# Altium PCB charger_sdc_pcb.PcbDoc
Units mm, origin at the board's own origin, x right, y up, seen from the top; angles counter-clockwise.
Board outline 70.3 x 49 mm, 2 copper layers (Top Layer, Bottom Layer); 35 components, 23 nets, 116 pads, 20 vias.
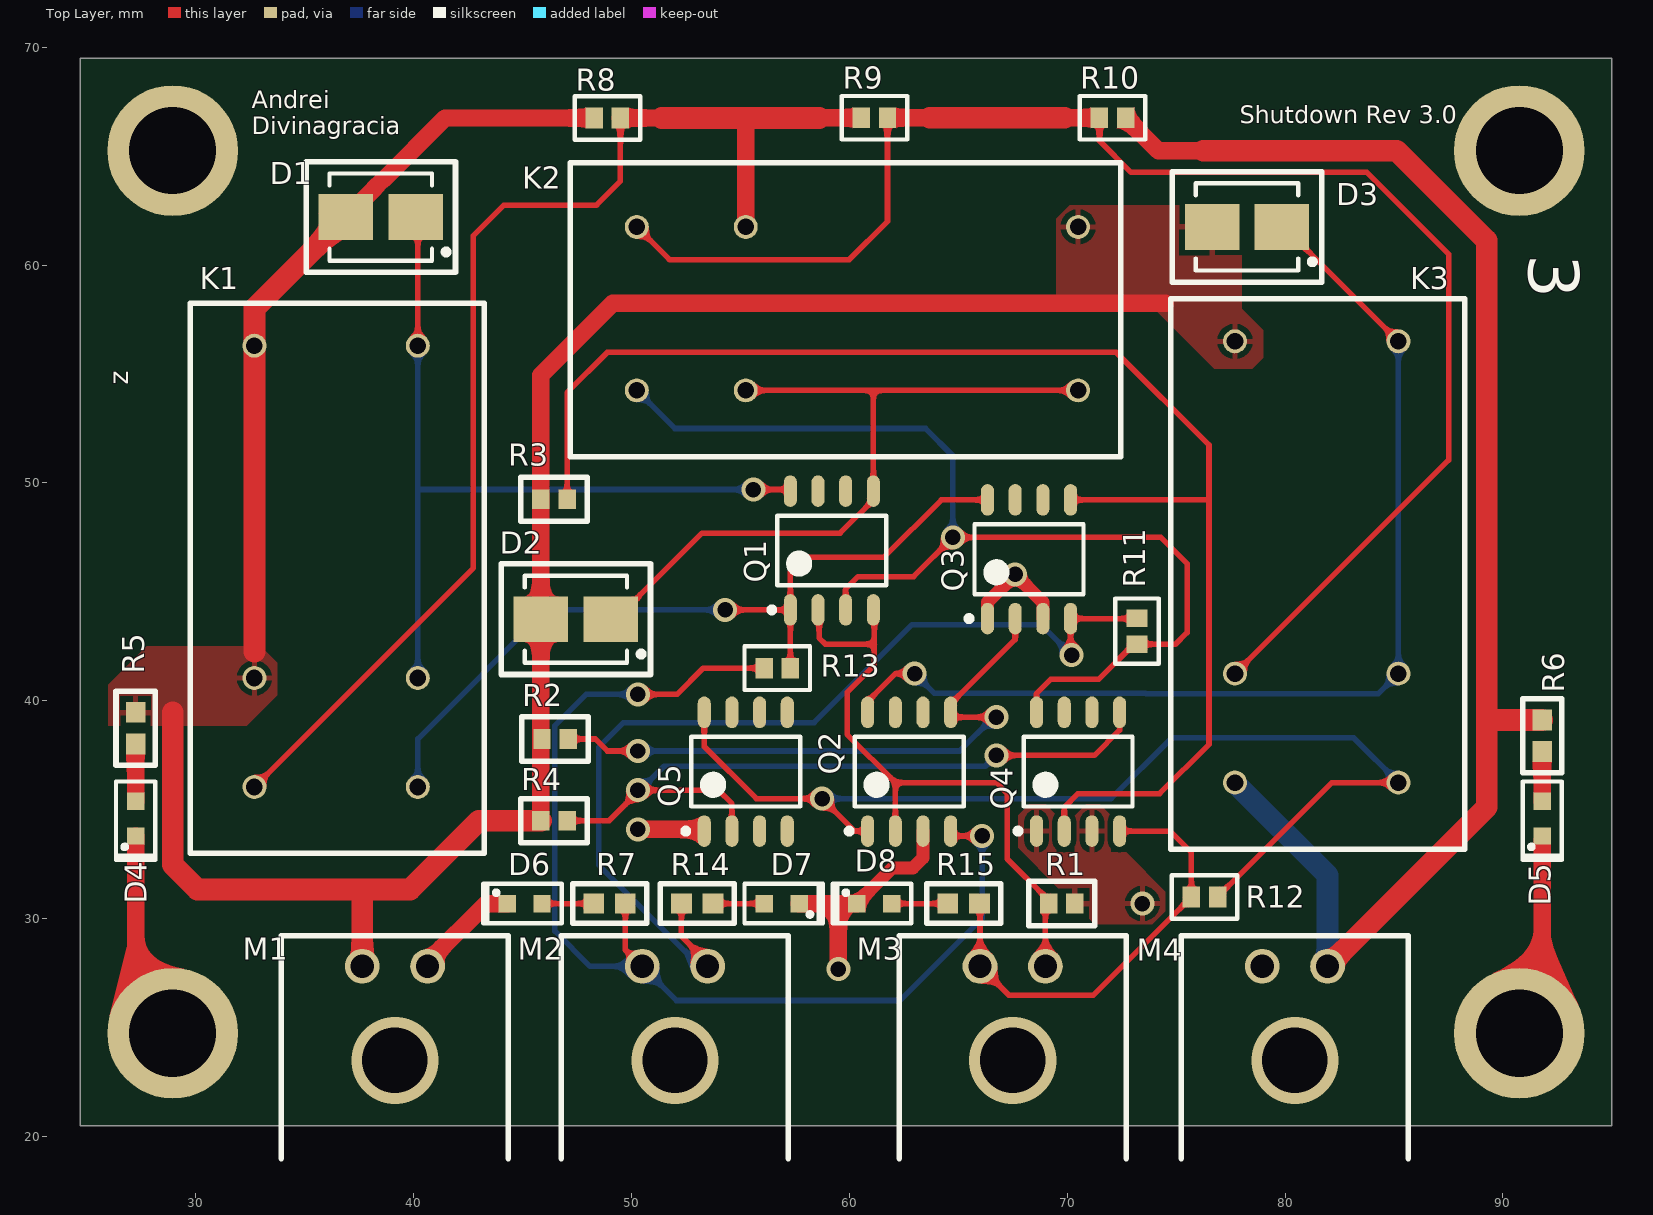
[diagram p0: Top Layer view]
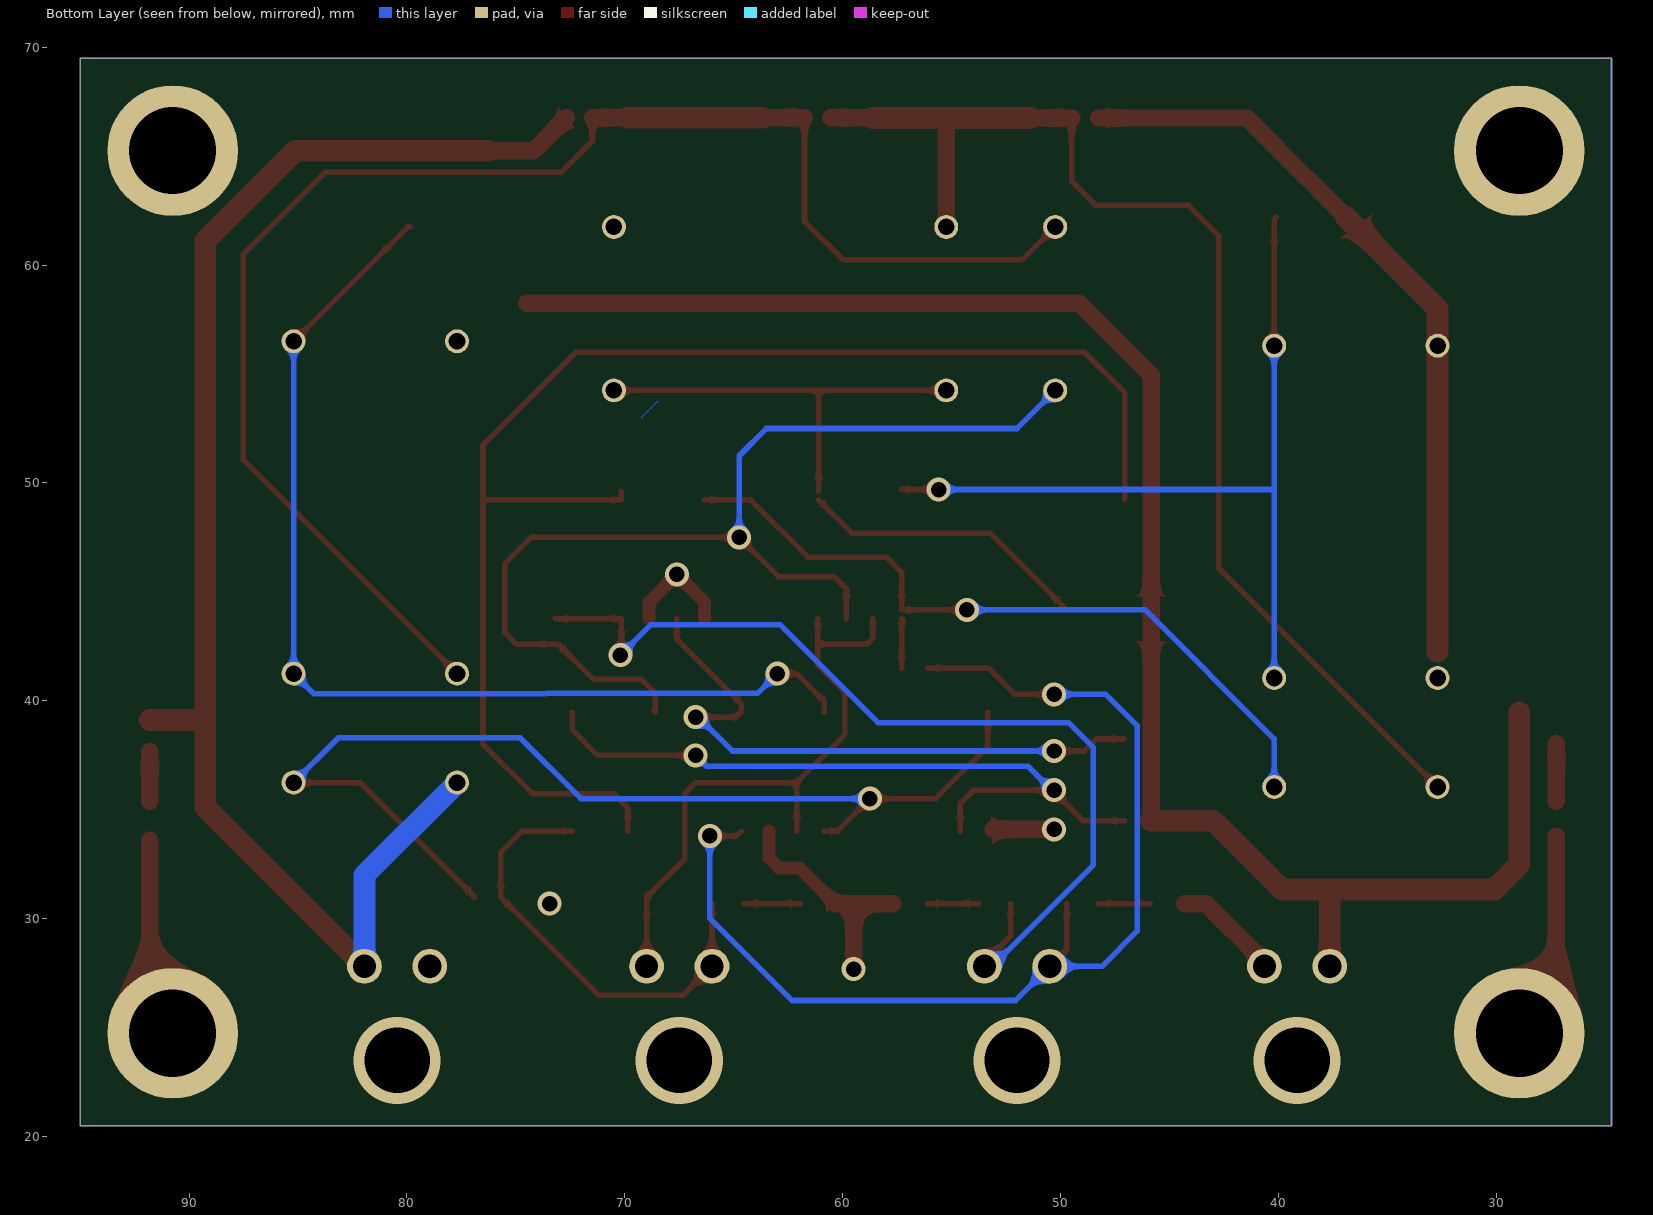
[diagram p1: Bottom Layer view, seen from below]

## Layer stack, top to bottom
Top Solder: solder mask 0.0102, Solder Resist, Dk 3.5
Top Layer: signal copper 0.0356
Dielectric 1: dielectric 0.32, FR-4, Dk 4.8
Bottom Layer: signal copper 0.0356
Bottom Solder: solder mask 0.0102, Solder Resist, Dk 3.5

## Board outline
24.7,20.5 95,20.5 95,69.5 24.7,69.5

## Design rules (kind name [scope] priority, off if disabled: settings)
Clearance [All] p1: gap=0.254 ignorepadtopadclearanceinfootprint=FALSE except(0: Arc-Hole Track-Hole SMDPad-Hole THPad-Hole Via-Hole Fill-Hole Poly-Hole Region-Hole Text-Hole)
PolygonConnect [All] p1: connectstyle=Relief reliefconductorwidth=0.254 reliefentries=4 polygonreliefangle="90 Angle" airgapwidth=0.254
RoutingVias [All] p1: holewidth=0.711 width=1.27 viastyle="Through Hole" minholewidth=0.711 minwidth=1.27 maxholewidth=0.711 maxwidth=1.27
SolderMaskExpansion [All] p1: expansion=0.102
Width [All] p1: maxlimit=1 minlimit=0.254 preferedwidth=0.254 minimp=50.000000 maximp=50.000000 favimp=50.000000
30 further rules are at their usual default settings.

## Components (designator, comment, footprint, x,y, rotation, side; value= is the part's Value field where it differs from the comment)
D1 "SD560BTR" DIOM4436X26N 38.5,62.2 r180 top
D2 "SD560BTR" DIOM4436X26N 47.45,43.75 r180 top
D3 "SD560BTR" DIOM4436X26N 78.25,61.75 r180 top
D4 "Green" "LED GREEN" 27.25,34.6 r90 top
D5 "Green" "LED GREEN" 91.8,34.6 r90 top
D6 "Red" "LED RED" 45.1,30.7 r0 top
D7 "Red" "LED RED" 56.895,30.7 r180 top
D8 "Red" "LED RED" 61.145,30.7 r0 top
K1 "3A" RELAY02_FOOTPRINT 30,58 r270 top
K2 "3A" RELAY02_FOOTPRINT 72.2,64.45 r180 top
K3 "3A" RELAY02_FOOTPRINT 75,58.2 r270 top
M1 "MOLEX" "MOLEX 1" 39.15,23.5 r0 top
M2 "MOLEX" "MOLEX 1" 52,23.5 r0 top
M3 "MOLEX" "MOLEX 1" 67.5,23.5 r0 top
M4 "MOLEX" "MOLEX 1" 80.45,23.5 r0 top
Q1 "DMN2029USD-13" SOIC127P600X175-8N 59.2,46.9 r90 top
Q2 "DMN2029USD-13" SOIC127P600X175-8N 62.75,36.75 r90 top
Q3 "DMN2029USD-13" SOIC127P600X175-8N 68.25,46.5 r90 top
Q4 "DMN2029USD-13" SOIC127P600X175-8N 70.5,36.75 r90 top
Q5 "DMN2029USD-13" SOIC127P600X175-8N 55.25,36.75 r90 top
R1 "10KΩ" 10KOHM 69.75,30.7 r0 top
R2 "10KΩ" 10KOHM 46.5,38.25 r0 top
R3 "10KΩ" 10KOHM 46.45,49.25 r0 top
R4 "10KΩ" 10KOHM 46.45,34.5 r0 top
R5 "1KΩ" 1KOHM 27.25,38.75 r90 top
R6 "1KΩ" 1KOHM 91.8,38.4 r90 top
R7 "620Ω" 620OHM 49,30.7 r0 top
R8 "0R" 0OHM 48.9,66.75 r0 top
R9 "0R" 0OHM 61.155,66.76 r0 top
R10 "0R" 0OHM 72.08,66.76 r0 top
R11 "0R" 0OHM 73.2,43.2 r270 top
R12 "0R" 0OHM 76.3,31 r0 top
R13 "0R" 0OHM 56.695,41.5 r0 top
R14 "620Ω" 620OHM 53.025,30.7 r180 top
R15 "620Ω" 620OHM 65.25,30.7 r0 top

## Footprints (in the part's own frame and the unit in brackets; to place one, negate y for a bottom-side part, rotate by r counter-clockwise, add the part's x,y. Pads: shape width x height; smd on the part's side, far side on the other; paste and mask are expansions set on the pad)
0OHM [mm]
  rect 0.8x0.95 smd: 1(-0.6,0) 2(0.6,0)
  silkscreen extent -1.5,-1 1.5,1, body extent -0.8,-0.48 0.8,0.48, height 0.55
1KOHM [mm] "Chip Resistor, 2-Leads, Body 1.60x0.80mm, IPC Medium Density"
  rect 0.95x0.9 smd: 1(-0.725,0) 2(0.725,0)
  silkscreen extent -1.7,-0.9 1.7,0.9, body extent -0.85,-0.45 0.85,0.45, height 0.55
10KOHM [mm] "Chip Resistor, 2-Leads, Body 1.50x0.80mm, IPC Medium Density"
  rect 0.8x0.9 smd: 1(-0.6,0) 2(0.6,0)
  silkscreen extent -1.52,-1.02 1.52,1.02, body extent -0.8,-0.45 0.8,0.45, height 0.5
620OHM [mm]
  rect 0.95x0.9 smd: 1(-0.725,0) 2(0.725,0)
  silkscreen extent -1.7,-0.9 1.7,0.9, body extent -0.85,-0.45 0.85,0.45, height 0.55
DIOM4436X26N [mm] "Molded Diode, 2-Leads, Body 4.38x3.62mm, IPC Medium Density"
  rect 2.5x2.1 smd: 1(-1.6,0) 2(1.6,0)
  silkscreen extent -3.43,-2.54 3.43,2.54, body extent -2.35,-1.97 2.35,1.97, height 2.6
"LED GREEN" [mm]
  rect 0.8x0.8 smd: 1(0.8,0) 2(-0.8,0)
  silkscreen extent -1.9,-0.9 1.7,0.9, body extent -0.8,-0.4 0.8,0.4, height 0.7
"LED RED" [mm]
  rect 0.8x0.8 smd: 1(0.8,0) 2(-0.8,0)
  silkscreen extent -1.9,-0.9 1.7,0.9, body extent -0.8,-0.4 0.8,0.4, height 0.7
"MOLEX 1" [mm]
  round 1.6 hole 1.06: 1(-1.5,4.32) 2(1.5,4.32)
  silkscreen extent -5.21,-4.5 5.21,5.71, body extent -4.82,-4.57 4.83,5.33, height 6.13
RELAY02_FOOTPRINT [mm]
  round 1.1 hole 0.762: 1(1.7,10.2) 2(16.95,10.2) 3(21.95,10.2) 4(21.95,2.7) 5(16.95,2.7) 6(1.7,2.7)
  silkscreen extent -0.25,-0.25 25,13.25, body extent 0,0 24.4,12.9, height 24.51
SOIC127P600X175-8N [mm] "SOIC, 8-Leads, Body 4.90x3.90mm, Pitch 1.27mm, IPC Medium Density"
  oval 1.45x0.6 smd: 1(-2.725,1.905) 2(-2.725,0.635) 3(-2.725,-0.635) 4(-2.725,-1.905) 5(2.725,-1.905) 6(2.725,-0.635) 7(2.725,0.635) 8(2.725,1.905)
  silkscreen extent -2.85,-2.5 1.6,2.88, body extent -2,-2.5 2,2.5, height 1.75

## Part data
D1 D2 D3: "DIODE GEN PURP 600V 5A SMB", Average Rectified Current=5A, Case/Package=SMB, Manufacturer=SMC, Max Reverse Voltage (DC)=600V, Supplier Part Number 1=1655-1530-1-ND, Manufacturer Part Number=SD560BTR, Mount="Surface Mount", Packaging="Tape and Reel", Pricing 1="1=0.5, 10=0.358, 100=0.2106, 500=0.11922, 1000=0.0914 (USD)", Stock 1=109105, Supplier 1=Digi-Key
D4 D5: library part 150060VS75000, "WURTH ELEKTRONIK - 150060VS75000 - LED, 0603, B GREEN,  40MCD, 570NM", Case/Package=0603, Case Code (Metric)=1608, Forward Current=30mA, Forward Voltage=2V, Manufacturer 1="Wurth Electronics", Max Operating Temperature=85°C, Min Operating Temperature=-40°C, Package Quantity=1, Supplier Part Number 1=732-4980-6-ND, Test Current=20mA, Case Code (Imperial)=0603, Color=Green, ComponentLink1Description=https://katalog.we-online.de/led/datasheet/150060VS75000.pdf?src-supplier=Digi-Key, ComponentLink1URL=https://katalog.we-online.de/led/datasheet/150060VS75000.pdf?src-supplier=Digi-Key, Dominant Wavelength=570nm, Height=0.7mm, Length=1.6mm, Lens Style=Clear,Rectangular, Luminous Intensity=40mcd, Manufacturer Part Number 1=150060VS75000, Mount="Surface Mount", Number of Pins=2, Packaging="Tape and Reel", Pricing 1="1=0.14, 50=0.129, 100=0.11, 500=0.095 (USD)", REACH SVHC=Unknown, Stock 1=111445, Supplier 1=Digi-Key, Viewing Angle=140°, Wavelength=570nm, Width=0.8mm
D6 D7 D8: library part 150060RS75000, "WURTH ELEKTRONIK - 150060RS75000 - LED, 0603, RED, 250MCD, 625NM", Case/Package=0603, Case Code (Metric)=1608, Forward Current=30mA, Forward Voltage=2V, Manufacturer 1="Wurth Electronics", Max Operating Temperature=85°C, Min Operating Temperature=-40°C, Package Quantity=1, Supplier Part Number 1=732-4978-6-ND, Test Current=20mA, Case Code (Imperial)=0603, Color=Red, ComponentLink1Description=https://katalog.we-online.de/led/datasheet/150060RS75000.pdf?src-supplier=Digi-Key, ComponentLink1URL=https://katalog.we-online.de/led/datasheet/150060RS75000.pdf?src-supplier=Digi-Key, ComponentLink2Description=http://www.produktinfo.conrad.com/datenblaetter/750000-774999/759428-da-01-en-CHIPLED_0603_W_KL_ROT_150060RS75000.pdf?src-supplier=Conrad, ComponentLink2URL=http://www.produktinfo.conrad.com/datenblaetter/750000-774999/759428-da-01-en-CHIPLED_0603_W_KL_ROT_150060RS75000.pdf?src-supplier=Conrad, Dominant Wavelength=625nm, Height=0.7mm, Length=1.6mm, Lens Style=Clear,Rectangular, Luminous Intensity=250mcd, Manufacturer Part Number 1=150060RS75000, Mount="Surface Mount", Packaging="Cut Tape", Pricing 1="1=0.14, 50=0.129, 100=0.11, 500=0.095 (USD)", REACH SVHC=Unknown, Stock 1=121418, Supplier 1=Digi-Key, Viewing Angle=140°, Wavelength=625nm, Width=0.8mm
K1 K2 K3: library part OSA-SS-212DM3,000, "RELAY TE CONNECTIVITY / OEG         OSA-SS-212DM3,000             General Purpose Relay, OSA Series, Power, Non Latching, DPST-NO, 12 VDC, 3 A", Coil Current=45mA, Coil Power=600mW, Coil Resistance=270R, Coil Voltage (DC)=12V, Contact Voltage Rating (AC)=240V, Manufacturer="TE Connectivity", Max Operating Temperature=60°C, Min Operating Temperature=-30°C, Package Quantity=1000, Supplier Part Number 1=OSA-SS-212DM3,000-ND, Coil Type=Non-Latching, ComponentLink1Description=http://www.farnell.com/datasheets/1652820.pdf?src-supplier=Farnell, ComponentLink1URL=http://www.farnell.com/datasheets/1652820.pdf?src-supplier=Farnell, ComponentLink2Description=http://www.farnell.com/cad/1652820.pdf?src-supplier=Element14, ComponentLink2URL=http://www.farnell.com/cad/1652820.pdf?src-supplier=Element14, ComponentLink3Description=http://www.te.com/commerce/DocumentDelivery/DDEController?Action=srchrtrv&DocNm=5-1419124-6&DocType=Customer+Drawing&DocLang=English&src-supplier=Digi-Key, ComponentLink3URL=http://www.te.com/commerce/DocumentDelivery/DDEController?Action=srchrtrv&DocNm=5-1419124-6&DocType=Customer+Drawing&DocLang=English&src-supplier=Digi-Key, Contact Current Rating=3A, Contact Material=Silver, ELV=Compliant, Height=0.976inch, Length=24.4mm, Manufacturer Part Number=OSA-SS-212DM3,000, Mount="Through Hole", Operate Time=20ms, Packaging=Box, Pricing 1="1=2.54, 10=2.385, 25=2.1204, 50=2.0142, 100=1.9083, 250=1.69624, 500=1.59022, 1000=1.48421, 5000=1.4312 (USD)", REACH SVHC=Unknown, Relay Type="General Purpose", Release Time=10ms, Stock 1=2623, Supplier 1=Digi-Key, Termination=PCB, Throw Configuration=DPST, Weight=13g, Width=12.9mm
M1 M2 M3 M4: library part 43650-0200, "MOLEX - 43650-0200 - CONNECTOR, HEADER, 2POS, 1ROW, 3MM", Color=Black, Contact Resistance=10mR, Current Rating=5A, Flammability Rating="UL94 V-0", Insulation Resistance=1GR, Manufacturer=Molex, Max Operating Temperature=105°C, Min Operating Temperature=-40°C, Package Quantity=3927, Supplier Part Number 1=0436500200, Voltage Rating=600V, Voltage Rating (AC)=250V, ComponentLink1Description=http://www.molex.com/webdocs/datasheets/pdf/en-us/0436500200_PCB_HEADERS.pdf?src-supplier=Avnet, ComponentLink1URL=http://www.molex.com/webdocs/datasheets/pdf/en-us/0436500200_PCB_HEADERS.pdf?src-supplier=Avnet, ComponentLink2Description=http://www.onlinecomponents.com/productFiles/mf-MOL/1029720436500200_pcb_headers.pdf?src-supplier=Onlinecomponents.com, ComponentLink2URL=http://www.onlinecomponents.com/productFiles/mf-MOL/1029720436500200_pcb_headers.pdf?src-supplier=Onlinecomponents.com, ComponentLink3Description=http://www.farnell.com/datasheets/1933359.pdf?src-supplier=Element14, ComponentLink3URL=http://www.farnell.com/datasheets/1933359.pdf?src-supplier=Element14, ComponentLink4Description=https://www.distrelec.biz/Web/Downloads/20/66/04402066.pdf?mime=application%2Fpdf&src-supplier=Distrelec, ComponentLink4URL=https://www.distrelec.biz/Web/Downloads/20/66/04402066.pdf?mime=application%2Fpdf&src-supplier=Distrelec, ComponentLink5Description=http://www.jameco.com/Jameco/Products/ProdDS/884053.pdf?src-supplier=Jameco, ComponentLink5URL=http://www.jameco.com/Jameco/Products/ProdDS/884053.pdf?src-supplier=Jameco, ComponentLink6Description=http://www.mouser.com/ds/2/276/0436500200_PCB_HEADERS-148844.pdf?src-supplier=Mouser, ComponentLink6URL=http://www.mouser.com/ds/2/276/0436500200_PCB_HEADERS-148844.pdf?src-supplier=Mouser, ComponentLink7Description=http://uk.rs-online.com/webdocs/13c3/0900766b813c3b7d.pdf?src-supplier=RSComponents, ComponentLink7URL=http://uk.rs-online.com/webdocs/13c3/0900766b813c3b7d.pdf?src-supplier=RSComponents, ComponentLink8Description=http://www.molex.com/webdocs/datasheets/pdf/en-us/0436500200_PCB_HEADERS.pdf?src-supplier=Avnet+Europe, ComponentLink8URL=http://www.molex.com/webdocs/datasheets/pdf/en-us/0436500200_PCB_HEADERS.pdf?src-supplier=Avnet+Europe, ComponentLink9Description=http://www.farnell.com/datasheets/1709823.pdf?src-supplier=Element14, ComponentLink9URL=http://www.farnell.com/datasheets/1709823.pdf?src-supplier=Element14, Connector Type=Plug,Socket, Contact Material=Brass,Tin, Contact Plating=Tin, Depth=9.9mm, Gender=Male, Glow Wire Compliant=Compliant, Halogen Free="Low Halogen", Height=5.57mm, Housing Color=Black, Housing Material=Thermoplastic, Lead Free="Lead Free", Length=9.65mm, Manufacturer Part Number=43650-0200, Mount="Through Hole", Number of Circuits=2, Number of Contacts=2, Number of Positions=2, Number of Rows=1, Orientation="Right Angle", Packaging=Tray, Pitch=3mm, Pricing 1="1=0.39494, 10=0.36394, 25=0.34123, 50=0.33065, 100=0.32119 (USD)", Radiation Hardening=No, REACH SVHC=Unknown, Stock 1=0, Supplier 1=Avnet, Termination=Solder, Voltage Rating (DC)=250V, Working Voltage=250V
Q1 Q2 Q3 Q4 Q5: "MOSFET 2N-CH 20V 5.8A 8SO", Case/Package=SO, Continuous Drain Current (ID)=5.8A, Drain to Source Resistance=35mR, Drain to Source Voltage (Vdss)=20V, Gate to Source Voltage (Vgs)=8V, Input Capacitance=1.171nF, Manufacturer=Diodes, Max Operating Temperature=150°C, Max Power Dissipation=1.2W, Min Operating Temperature=-55°C, Package Quantity=2500, Supplier Part Number 1=DMN2029USD-13DICT-ND, ComponentLink1Description=https://www.diodes.com/assets/Datasheets/DMN2029USD.pdf?src-supplier=Digi-Key, ComponentLink1URL=https://www.diodes.com/assets/Datasheets/DMN2029USD.pdf?src-supplier=Digi-Key, Fall Time=53.5ns, FET Type="2 N-Channel", Height=1.5mm, Length=4.95mm, Manufacturer Part Number=DMN2029USD-13, Mount="Surface Mount", Number of Pins=8, Packaging="Tape and Reel", Pricing 1="1=0.47, 10=0.397, 100=0.2974, 500=0.21812, 1000=0.16854 (USD)", Radiation Hardening=No, Rds On Max=25mR, REACH SVHC="No SVHC", Rise Time=33.3ns, Stock 1=1364, Supplier 1=Digi-Key, Turn-Off Delay Time=119.3ns, Turn-On Delay Time=16.5ns, Width=3.95mm
R1 R2 R3 R4: library part RNCP0603FTD10K0, "RES 10K OHM 1% 1/8W 0603", Case/Package=0603, Case Code (Metric)=1608, Manufacturer="Stackpole Electronics", Max Operating Temperature=155°C, Max Power Dissipation=125mW, Min Operating Temperature=-55°C, Resistance=10kR, Supplier Part Number 1=RNCP0603FTD10K0DKR-ND, Temperature Coefficient=100ppm/°C, Tolerance=1%, Case Code (Imperial)=0603, Composition="Thin Film", Contact Plating=Tin,Matte, Features="Moisture Resistant,Anti-Sulfur", Height=0.02inch, Lead Free="Lead Free", Length=0.059inch, Manufacturer Part Number=RNCP0603FTD10K0, Mount="Surface Mount", Number of Terminations=2, Packaging="Tape and Reel", Pricing 1="1=0.1, 10=0.067, 100=0.0273, 1000=0.01224, 2500=0.01063 (USD)", Radiation Hardening=No, Stock 1=85524, Supplier 1=Digi-Key, Width=0.031inch
R5 R6: library part RC0201FR-071KL, "YAGEO - RC0201FR-071KL - DICKSCHICHTWIDERSTAND 1K 1% 0.05W 0201", Case/Package=0201, Case Code (Metric)=0603, Manufacturer 1=Yageo, Max Operating Temperature=125°C, Max Power Dissipation=50mW, Min Operating Temperature=-55°C, Package Quantity=10000, Resistance=1kR, Supplier Part Number 1=311-1KMDKR-ND, Temperature Coefficient=200ppm/°C, Tolerance=1%, Voltage Rating=25V, Case Code (Imperial)=0201, ComponentLink1Description=http://www.yageo.com/documents/recent/PYu-RC0201_51_RoHS_L_8.pdf?src-supplier=Avnet+Europe, ComponentLink1URL=http://www.yageo.com/documents/recent/PYu-RC0201_51_RoHS_L_8.pdf?src-supplier=Avnet+Europe, ComponentLink2Description=http://www.farnell.com/datasheets/2167052.pdf?src-supplier=Element14, ComponentLink2URL=http://www.farnell.com/datasheets/2167052.pdf?src-supplier=Element14, ComponentLink3Description=http://www.yageo.com/documents/recent/PYu-RC_Group_51_RoHS_L_10.pdf?src-supplier=Digi-Key, ComponentLink3URL=http://www.yageo.com/documents/recent/PYu-RC_Group_51_RoHS_L_10.pdf?src-supplier=Digi-Key, ComponentLink4Description=http://www.yageo.com/documents/recent/PYu-RC0201_51_RoHS_L_8.pdf?src-supplier=Avnet, ComponentLink4URL=http://www.yageo.com/documents/recent/PYu-RC0201_51_RoHS_L_8.pdf?src-supplier=Avnet, Composition="Thick Film", Contact Plating=Tin,Matte, Depth=0.3mm, Features="Moisture Resistant", Height=0.01inch, Lead Free="Lead Free", Length=0.024inch, Manufacturer Part Number 1=RC0201FR-071KL, Military Standard=Not, Number of Terminations=2, Packaging="Tape and Reel", Power Rating=50mW, Pricing 1="1=0.1, 10=0.042, 100=0.0171, 1000=0.00768, 2500=0.00666, 5000=0.00551 (USD)", Radiation Hardening=No, REACH SVHC=Unknown, Stock 1=3545827, Supplier 1=Digi-Key, Termination=SMD/SMT, Width=0.012inch, Working Voltage=25V
R7 R14 R15: library part RC0201FR-07620RL, "RC0201 Series 0201 0.05 W 620 Ohms 1% ±200 ppm/°C SMT Thick Film Chip Resistor", Case/Package=0201, Case Code (Metric)=0603, Manufacturer 1=Yageo, Max Operating Temperature=125°C, Max Power Dissipation=50mW, Min Operating Temperature=-55°C, Package Quantity=10000, Resistance=620R, Supplier Part Number 1=YAG2348CT-ND, Temperature Coefficient=200ppm/°C, Tolerance=1%, Voltage Rating=25V, Case Code (Imperial)=0201, ComponentLink1Description=http://www.yageo.com.tw/exep/pages/download/literatures/PYu-R_INT-thick_7.pdf?src-supplier=Digi-Key, ComponentLink1URL=http://www.yageo.com.tw/exep/pages/download/literatures/PYu-R_INT-thick_7.pdf?src-supplier=Digi-Key, Composition="Thick Film", Depth=0.3mm, Features="Moisture Resistant", Height=0.01inch, Lead Free="Lead Free", Length=0.6mm, Manufacturer Part Number 1=RC0201FR-07620RL, Military Standard=Not, Number of Terminations=2, Packaging="Tape and Reel", Power Rating=50mW, Pricing 1="1=0.1, 10=0.042, 100=0.0171, 1000=0.00768, 2500=0.00666, 5000=0.00551 (USD)", Stock 1=50190, Supplier 1=Digi-Key, Termination=SMD/SMT, Width=0.012inch
R8 R9 R10 R11 R12 R13: library part RMCF0603ZT0R00_1, "RES 0 OHM JUMPER 1/10W 0603", Case/Package=0603, Case Code (Metric)=1608, Current Rating=1A, Manufacturer="Stackpole Electronics", Manufacturer Part Number=RMCF0603ZT0R00, Max Operating Temperature=155°C, Max Power Dissipation=100mW, Min Operating Temperature=-55°C, Resistance=0mR, Supplier Part Number 1=RMCF0603ZT0R00DKR-ND, Working Voltage=75V, Case Code (Imperial)=0603, ComponentLink1Description=https://www.seielect.com/catalog/SEI-Packaging.pdf?src-supplier=Avnet, ComponentLink1URL=https://www.seielect.com/catalog/SEI-Packaging.pdf?src-supplier=Avnet, ComponentLink2Description=https://www.seielect.com/catalog/SEI-Packaging.pdf?src-supplier=Verical, ComponentLink2URL=https://www.seielect.com/catalog/SEI-Packaging.pdf?src-supplier=Verical, ComponentLink3Description=https://www.seielect.com/catalog/SEI-Packaging.pdf?src-supplier=Arrow, ComponentLink3URL=https://www.seielect.com/catalog/SEI-Packaging.pdf?src-supplier=Arrow, ComponentLink4Description=https://www.seielect.com/catalog/SEI-Packaging.pdf?src-supplier=Digi-Key, ComponentLink4URL=https://www.seielect.com/catalog/SEI-Packaging.pdf?src-supplier=Digi-Key, ComponentLink5Description=https://www.seielect.com/Catalog/SEI-RMCF_RMCP.pdf?src-supplier=Digi-Key, ComponentLink5URL=https://www.seielect.com/Catalog/SEI-RMCF_RMCP.pdf?src-supplier=Digi-Key, Composition="Thick Film", Contact Plating=Tin,Matte, Depth=0.8mm, Features="Automotive AEC-Q200", Height=0.022inch, Lead Free="Lead Free", Length=1.55mm, Military Standard=Not, Mount="Surface Mount", Number of Terminations=2, Packaging="Tape and Reel", Power Rating=100mW, Pricing 1="1=0.1, 10=0.016, 25=0.0116, 50=0.0088, 100=0.0064, 250=0.00492, 500=0.00392, 1000=0.00289 (USD)", Radiation Hardening=No, Stock 1=2474175, Supplier 1=Digi-Key, Width=0.031inch

## Free pads (board coordinates)
  round 6 hole 4 unplated: H(28.95,24.75) H(28.95,65.25) H(90.75,24.75) H(90.75,65.25)

## Via types
v1: diameter 1.1, hole 0.711, Top Layer to Bottom Layer, 16 vias
v2: diameter 4, hole 3, Top Layer to Bottom Layer, 4 vias

## Nets (pads, with @x,y where several pads share a name; then routed paths per layer and width w, separated by ;. In a path a pad name is that pad's centre, name@x,y a point inside that pad or via, vN(x,y) a via of type N, cw(c..) or ccw(c..) an arc to the next point about the centre after c; other vN are vias at no path point)
+12: D1.2 D2.2 D3.2 K1.5 K1.6 K2.6 K3.6 M1.1 R2.1 R3.1 R4.1 R5.2 R8.1 | length 114.5
  Top Layer w0.8: D1.2 38.196,63.496 38.196,63.521 38.579,63.904 38.604,63.904 41.45,66.75 R8.1@48.25,66.75 ; R4.1 R3.1 45.85,54.95 49.15,58.25 74.5,58.25
  Top Layer w1: 28.95,39.475 28.95,32.48 30.08,31.35 37.5,31.35 ; 32.7,42.25 K1.6 32.7,58 D1.2 ; M1.1 37.65,31.35 39.85,31.35 43,34.5 R4.1
+12V_TO_AIR: K3.4 M4.2 R6.2 R10.2 | length 68
  Top Layer w0.8: R10.2 74.19,65.25 76.25,65.25
  Top Layer w1: 76.25,65.25 85.125,65.25 89.25,61.125 89.25,39 ; M4.2 89.25,35.12 89.25,39 ; R6.2 89.375,39.125 89.25,39
  Bottom Layer w1: K3.4 81.95,32 M4.2
BMS_FAULT: M2.1 Q2.4 R7.2 R13.1 | length 51.1
  Top Layer w0.254: R7.2 49.725,28.575 M2.1@50.49,27.81 ; v1(50.3,40.3) 52.1,40.3 53.3,41.5 R13.1 ; Q2.4 64.88,33.8 v1(66.095,33.8)
  Bottom Layer w0.254: v1(50.3,40.3) 47.928,40.3 46.488,38.861 46.488,29.436 48.105,27.82 M2.1 52.07,26.25 62.325,26.25 66.095,30.02 v1(66.095,33.8)
BSPD_FAULT: M3.1 Q4.4 R12.1 R15.2 | length 20.7
  Top Layer w0.254: R15.2 66,30.675 M3.1 67.32,26.5 71.2,26.5 R12.1 75.7,33.05 74.725,34.025 Q4.4
GND: D4.2 D5.2 D6.2 D7.2 D8.2 M1.2 M4.1 pad.H Q2.3 Q3.1 Q3.3 Q4.1 Q4.3 Q5.1 R1.2 | length 41.4
  Top Layer w0.254: pad.H@90,24.75 pad.H@91.8,26.55 ; D5.2@91.6,33.8 D5.2@91.8,33.6
  Top Layer w0.6: D8.2 61.975,32.33 62.92,32.33 63.385,32.795 Q2.3 ; Q3.1 66.345,44.53 v1(67.615,45.8) 68.885,44.53 Q3.3
  Top Layer w0.8: pad.H@27.25,25.7 D4.2 ; M1.2@40.7,28.07 43.33,30.7 D6.2 ; v1(50.3,34.1) Q5.1@53.1,34.1 ; D7.2 59.5,30.7 ; v1(59.5,27.693) 59.5,30.7 ; D8.2 59.5,30.7 ; pad.H@91.8,26.55 D5.2@91.8,33.6
  other v1: 73.45,30.7
IMD_FAULT: M2.2 Q3.4 R11.1 R14.2 | length 44.9
  Top Layer w0.254: R14.2 52.3,29.2 M2.2@53.5,28 ; v1(70.2,42.1) 70.155,42.145 Q3.4 73.175,43.775 R11.1
  Bottom Layer w0.254: M2.2@53.48,27.82 53.157,27.82 48.5,32.477 48.5,37.867 49.633,39 58.386,39 62.886,43.5 68.8,43.5 v1(70.2,42.1)
NetD1_1: D1.1 K1.1 K1.2 Q1.8 | length 38.2
  Top Layer w0.254: D1.1 40.2,62.1 K1.1 ; v1(55.6,49.7) Q1.8@57.3,49.7
  Bottom Layer w0.254: K1.2 K1.1 ; 40.25,49.7 v1(55.6,49.7)
NetD2_1: D2.1 K2.1 K2.2 Q1.5 | length 33.2
  Top Layer w0.254: D2.1@49.852,44.247 49.852,44.302 53.25,47.7 59.58,47.7 Q1.5@61.105,49.225 ; K2.2 61.105,54.25 ; Q1.5 61.105,54.25 ; K2.1 61.105,54.25
NetD3_1: D3.1 K3.1 K3.2 Q2.8 | length 48.9
  Top Layer w0.254: Q2.8 60.845,39.98 62.115,41.25 v1(63,41.25) ; D3.1 79.95,61.75 K3.1
  Bottom Layer w0.254: v1(63,41.25) 63.905,40.345 73.595,40.345 73.621,40.319 84.269,40.319 K3.2 K3.1
NetD4_1: D4.1 R5.1 | length 2.6
  Top Layer w0.8: D4.1 R5.1
NetD5_1: D5.1 R6.1 | length 2.3
  Top Layer w0.8: D5.1 R6.1
NetD6_1: D6.1 R7.1 | length 2.4
  Top Layer w0.254: D6.1 R7.1
NetD7_1: D7.1 R14.1 | length 2.3
  Top Layer w0.254: R14.1 D7.1
NetD8_1: D8.1 R15.1 | length 2.6
  Top Layer w0.254: D8.1 R15.1
NetK1_3: K1.3 Q1.1 Q3.8 R13.2 | length 36.3
  Top Layer w0.254: v1(54.3,44.175) Q1.1 57.295,45.895 58,46.6 61.6,46.6 64.225,49.225 Q3.8 ; Q1.1@57.22,43.7 57.295,43.775 R13.2
  Bottom Layer w0.254: K1.3 40.2,38.26 46.115,44.175 v1(54.3,44.175)
NetK1_4: K1.4 K2.5 R8.2 R9.1 | length 56.2
  Top Layer w0.254: K1.4 42.75,46.1 42.75,61.35 44.15,62.75 48.4,62.75 49.5,63.85 R8.2
  Top Layer w0.8: R8.2 51.4,66.75 ; K2.5 55.25,66.75 ; 58.625,66.76 R9.1
  Top Layer w1: 51.4,66.75 55.25,66.75 58.615,66.75 58.625,66.76
NetK2_3: K2.3 Q1.3 Q4.8 R11.2 | length 50.2
  Top Layer w0.254: Q1.3@59.835,43.775 Q1.3 59.835,45.135 60.4,45.7 62.95,45.7 v1(64.75,47.5) 74.3,47.5 75.5,46.3 75.5,43.135 74.965,42.6 73.055,42.6 71.455,41 69.25,41 68.595,40.345 Q4.8 Q4.8@68.66,39.54
  Bottom Layer w0.254: K2.3 52,52.5 63.5,52.5 64.75,51.25 v1(64.75,47.5)
NetK2_4: K2.4 K3.5 R9.2 R10.1 | length 69.9
  Top Layer w0.254: K2.4 51.75,60.25 60,60.25 61.755,62.005 R9.2 ; R10.1 71.48,65.705 72.935,64.25 83.75,64.25 87.5,60.5 87.5,51.05 K3.5
  Top Layer w0.8: R9.2 63.7,66.76 ; 69.875,66.76 R10.1
  Top Layer w1: 63.7,66.76 69.875,66.76
NetK3_3: K3.3 Q2.1 Q5.8 R12.2 | length 49.6
  Top Layer w0.254: Q5.8 53.345,37.905 55.739,35.511 v1(58.75,35.511) 60.236,34.025 Q2.1 ; R12.2 82.15,36.25 K3.3
  Bottom Layer w0.254: v1(58.75,35.511) 72.011,35.511 74.8,38.3 83.15,38.3 K3.3
NetQ2_5: Q2.5 Q3.2 R2.2 | length 28
  Top Layer w0.254: R2.2 48.35,38.25 48.9,37.7 v1@50.2,37.7 ; v1@66.615,39.25 64.93,39.25 64.68,39.5 Q2.5 64.655,39.855 67.615,42.815 Q3.2
  Bottom Layer w0.254: v1@50.2,37.7 v1(50.3,37.7) 65.065,37.7 v1@66.615,39.25
  other v1: 66.75,39.25
NetQ3_5: Q3.5 Q4.2 R3.2 | length 66.3
  Top Layer w0.254: R3.2 47.05,54.15 48.9,56 72.25,56 76.508,51.742 76.508,38.008 74.242,35.742 70.492,35.742 69.865,35.115 Q4.2 ; Q3.5@70.155,49.595 Q3.5 76.5,49.225
NetQ4_5: Q4.5 Q5.2 R4.2 | length 33.4
  Top Layer w0.254: R4.2 48.977,34.5 v1@50.238,35.762 ; v1@50.4,35.9 54,35.9 54.615,35.285 Q5.2 ; v1(66.75,37.5) 71.25,37.5 72.405,38.655 Q4.5
  Bottom Layer w0.254: v1@50.4,35.9 51.5,37 66.25,37 v1(66.75,37.5)
  other v1: 50.3,35.9
SET/RESET: M3.2 Q1.2 Q1.4 Q2.2 R1.1 | length 28.7
  Top Layer w0.254: Q1.2@58.615,43.775 58.615,42.885 58.9,42.6 61.155,42.6 ; Q1.4@61.155,43.775 61.155,42.6 ; Q2.2 62.115,36.25 ; M3.2 69,31 67.25,32.75 67.25,35.75 66.75,36.25 62.115,36.25 ; 61.155,42.6 61.155,41.65 59.899,40.394 59.899,38.466 62.115,36.25
pads on no net: Q1.6 Q1.7 Q2.6 Q2.7 Q3.6 Q3.7 Q4.6 Q4.7 Q5.3 Q5.4 Q5.5 Q5.6 Q5.7
copper on no net:
  other v2: 39.15,23.5 52,23.5 67.5,23.5 80.45,23.5

## Polygon pours and split planes (outlines as drawn)
GND on Top Layer "Top Layer-GND" (solid, pour order 36): 69.5,34.75 69.021,35.25 68.25,35.25 67.75,34.75 67.75,33.25 71.25,29.75 74,29.75 74.5,30.25 74.5,31.25 72.7,33.05 72,33.05 72,34.75 71.5,35.25 70.88,35.25 70.35,34.72 70.35,33.05 69.5,33.05
+12 on Top Layer "Top Layer-+12" (solid, pour order 34): 78,62.75 78,58 79,57 79,55.75 78.5,55.25 76.75,55.25 74,58 69.5,58 69.5,62.135 70.115,62.75
+12 on Top Layer "Top Layer-+12 2" (solid, pour order 32): 68.994,58.5
+12 on Top Layer "Top Layer-+12 3" (solid, pour order 30): 69.597,59.25
+12 on Top Layer "Top Layer-No Net 1" (solid, pour order 22): 26,38.861 26,40.75 27.75,42.5 33,42.5 33.75,41.75 33.75,40.25 32.361,38.861
no net on Top Layer "Top Layer-No Net" (solid, pour order 12): 24.5,37.75
+12 on Top Layer "Top Layer-+12 1" (solid, pour order 16): 32.49,39.25
GND on Bottom Layer "Bottom Layer-No Net" (solid, shelved, pour order 24): 24.75,69.5 95,69.5 95,20.5 24.75,20.5
no net on Bottom Layer "Bottom Layer-No Net 1" (solid, pour order 20): 26.5,39
no net on Bottom Layer "GND" (solid, pour order 2): 68.5,53.75 69.25,53

## Other copper
Top Layer:
  region: 42.75,30.5
Bottom Layer:
  pour cut-out: 48.4,39.1 58.486,39.1 61.818,42.432 63,41.25 66.615,39.1 67,37.5 51.5,37 50.4,35.9 50.384,35.916 48.3,35.916

## Silkscreen, mask and mechanical layers (free items; w line width, h text height)
Top Overlay:
  text "Shutdown Rev 3.0" at 77.91,66.5 h0.8
  text "Andrei / Divinagracia" at 32.573,66 h0.8
  text "3" at 90.4,60.5 h4 r270
  text "z" at 27.2,54.5 h1.52 r90
Mechanical 29:
  lines w0.254: 24.7,20.5 94.9,20.5 95,20.6 95,69.5 24.7,69.5 24.7,20.5

## Dimensions
95,69.5 to 95,20.5 on Top Overlay
24.7,69.5 to 95,69.5 on Top Overlay